# EAGLE board Proiect v25 (EAGLE 9.7.0)
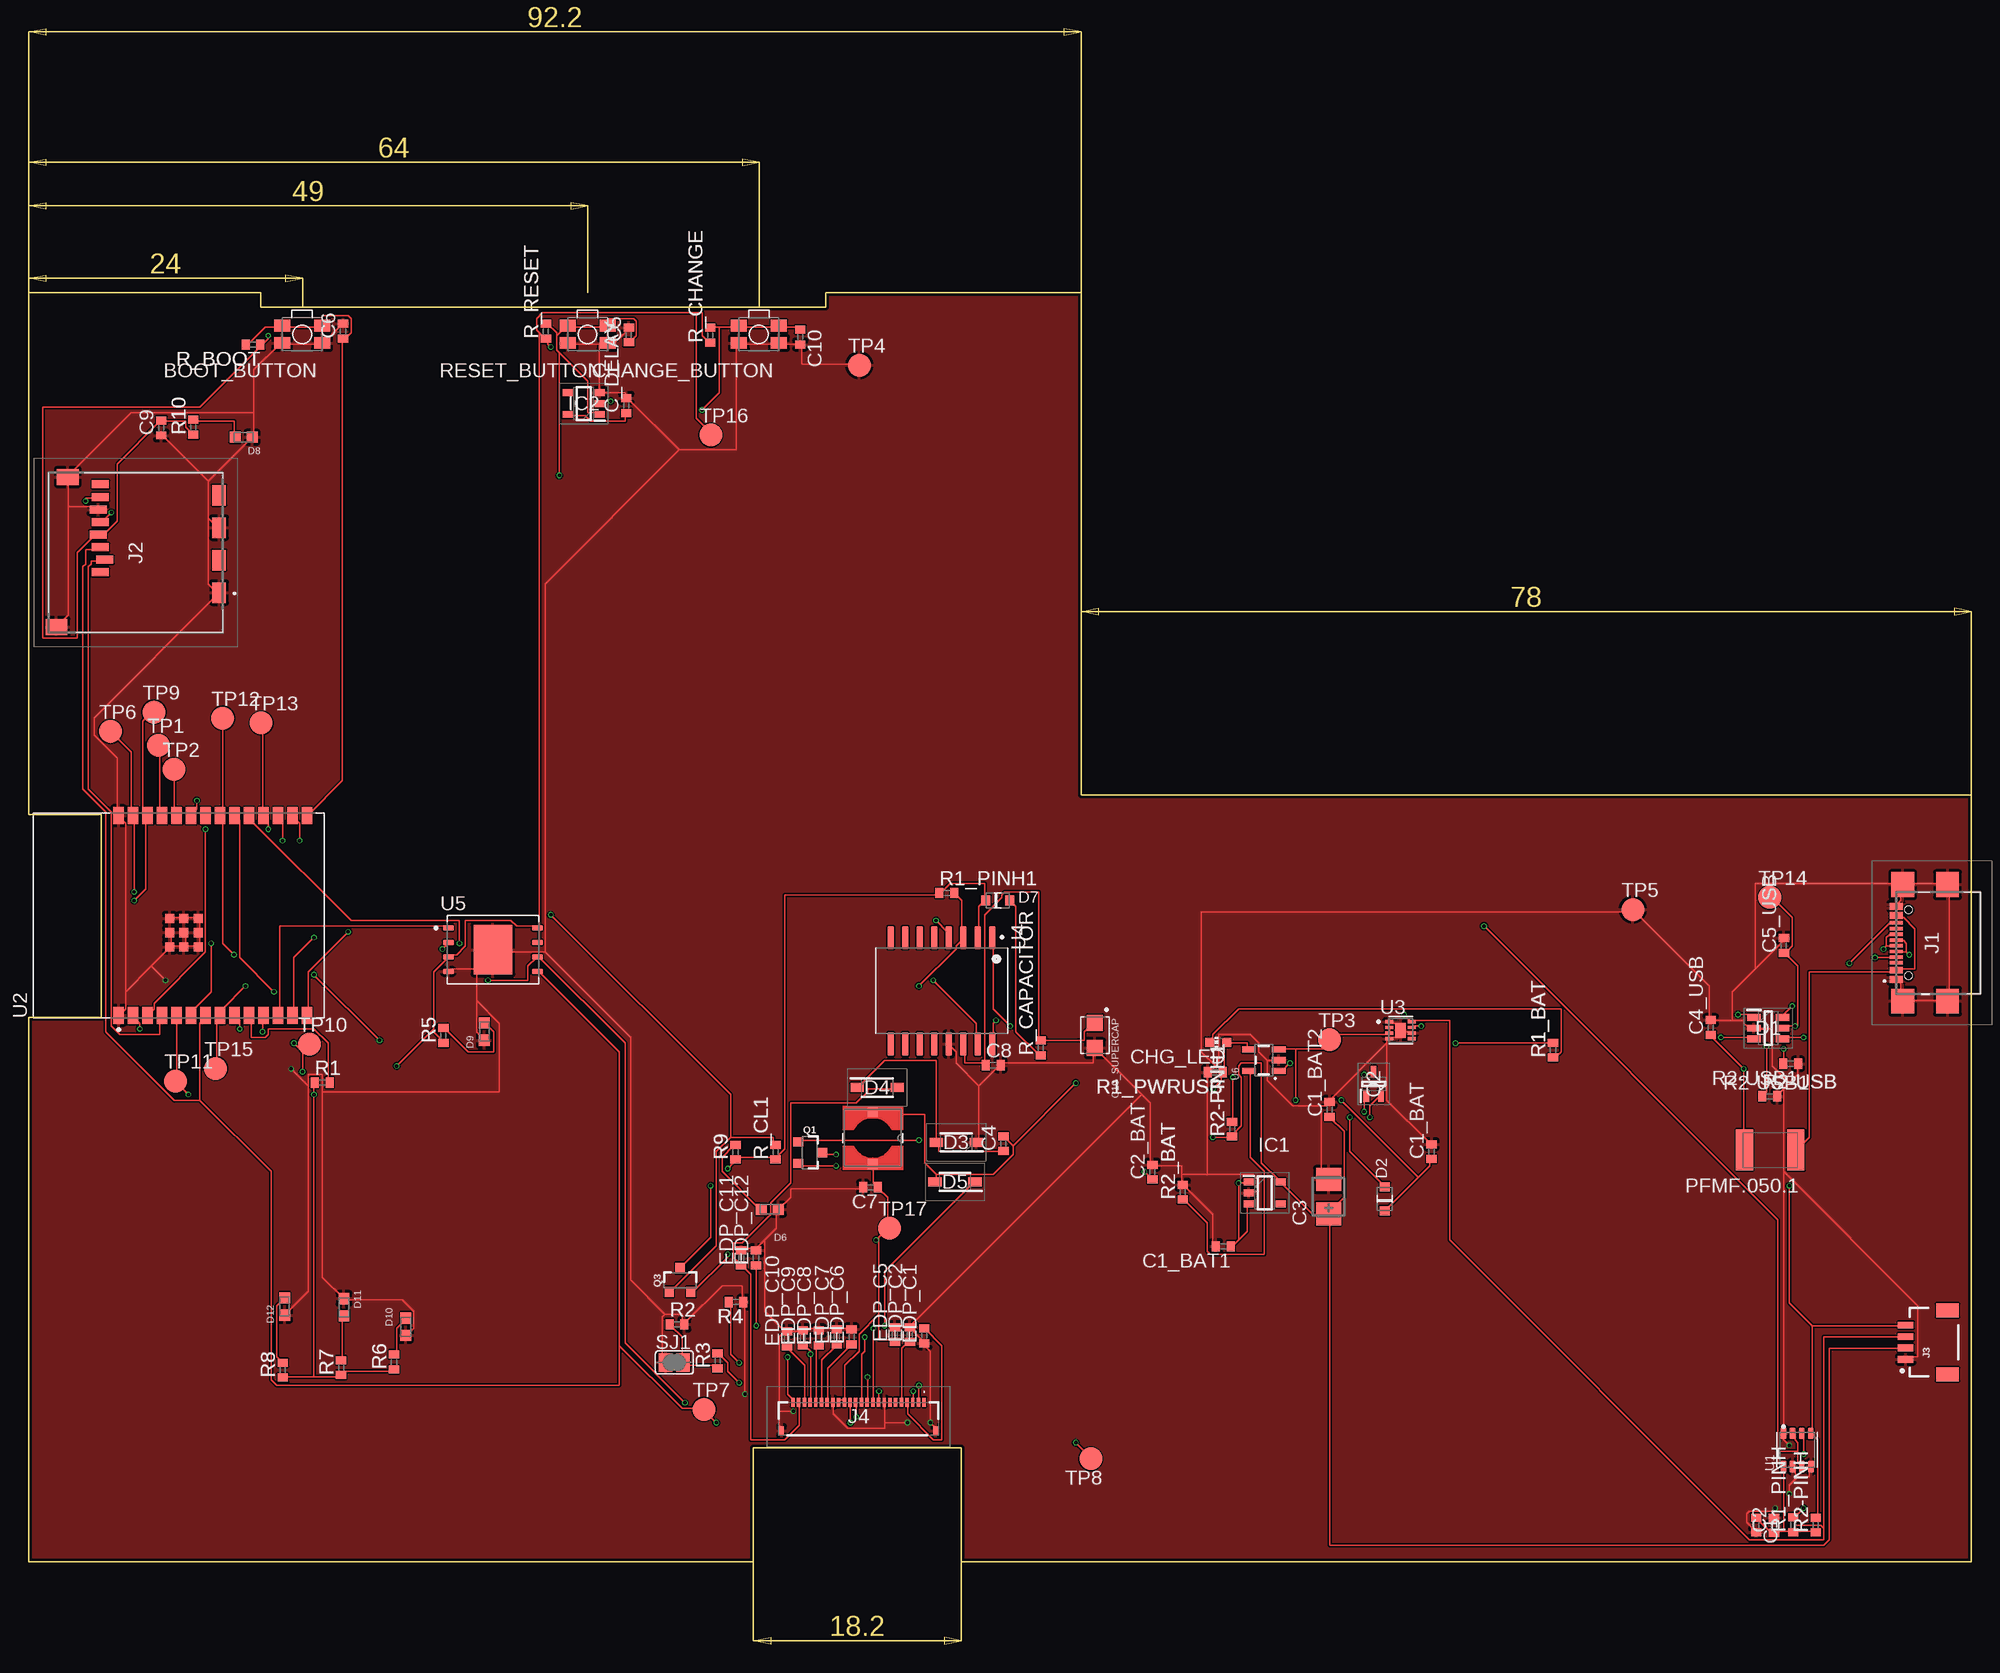
[diagram p0: board, top side]
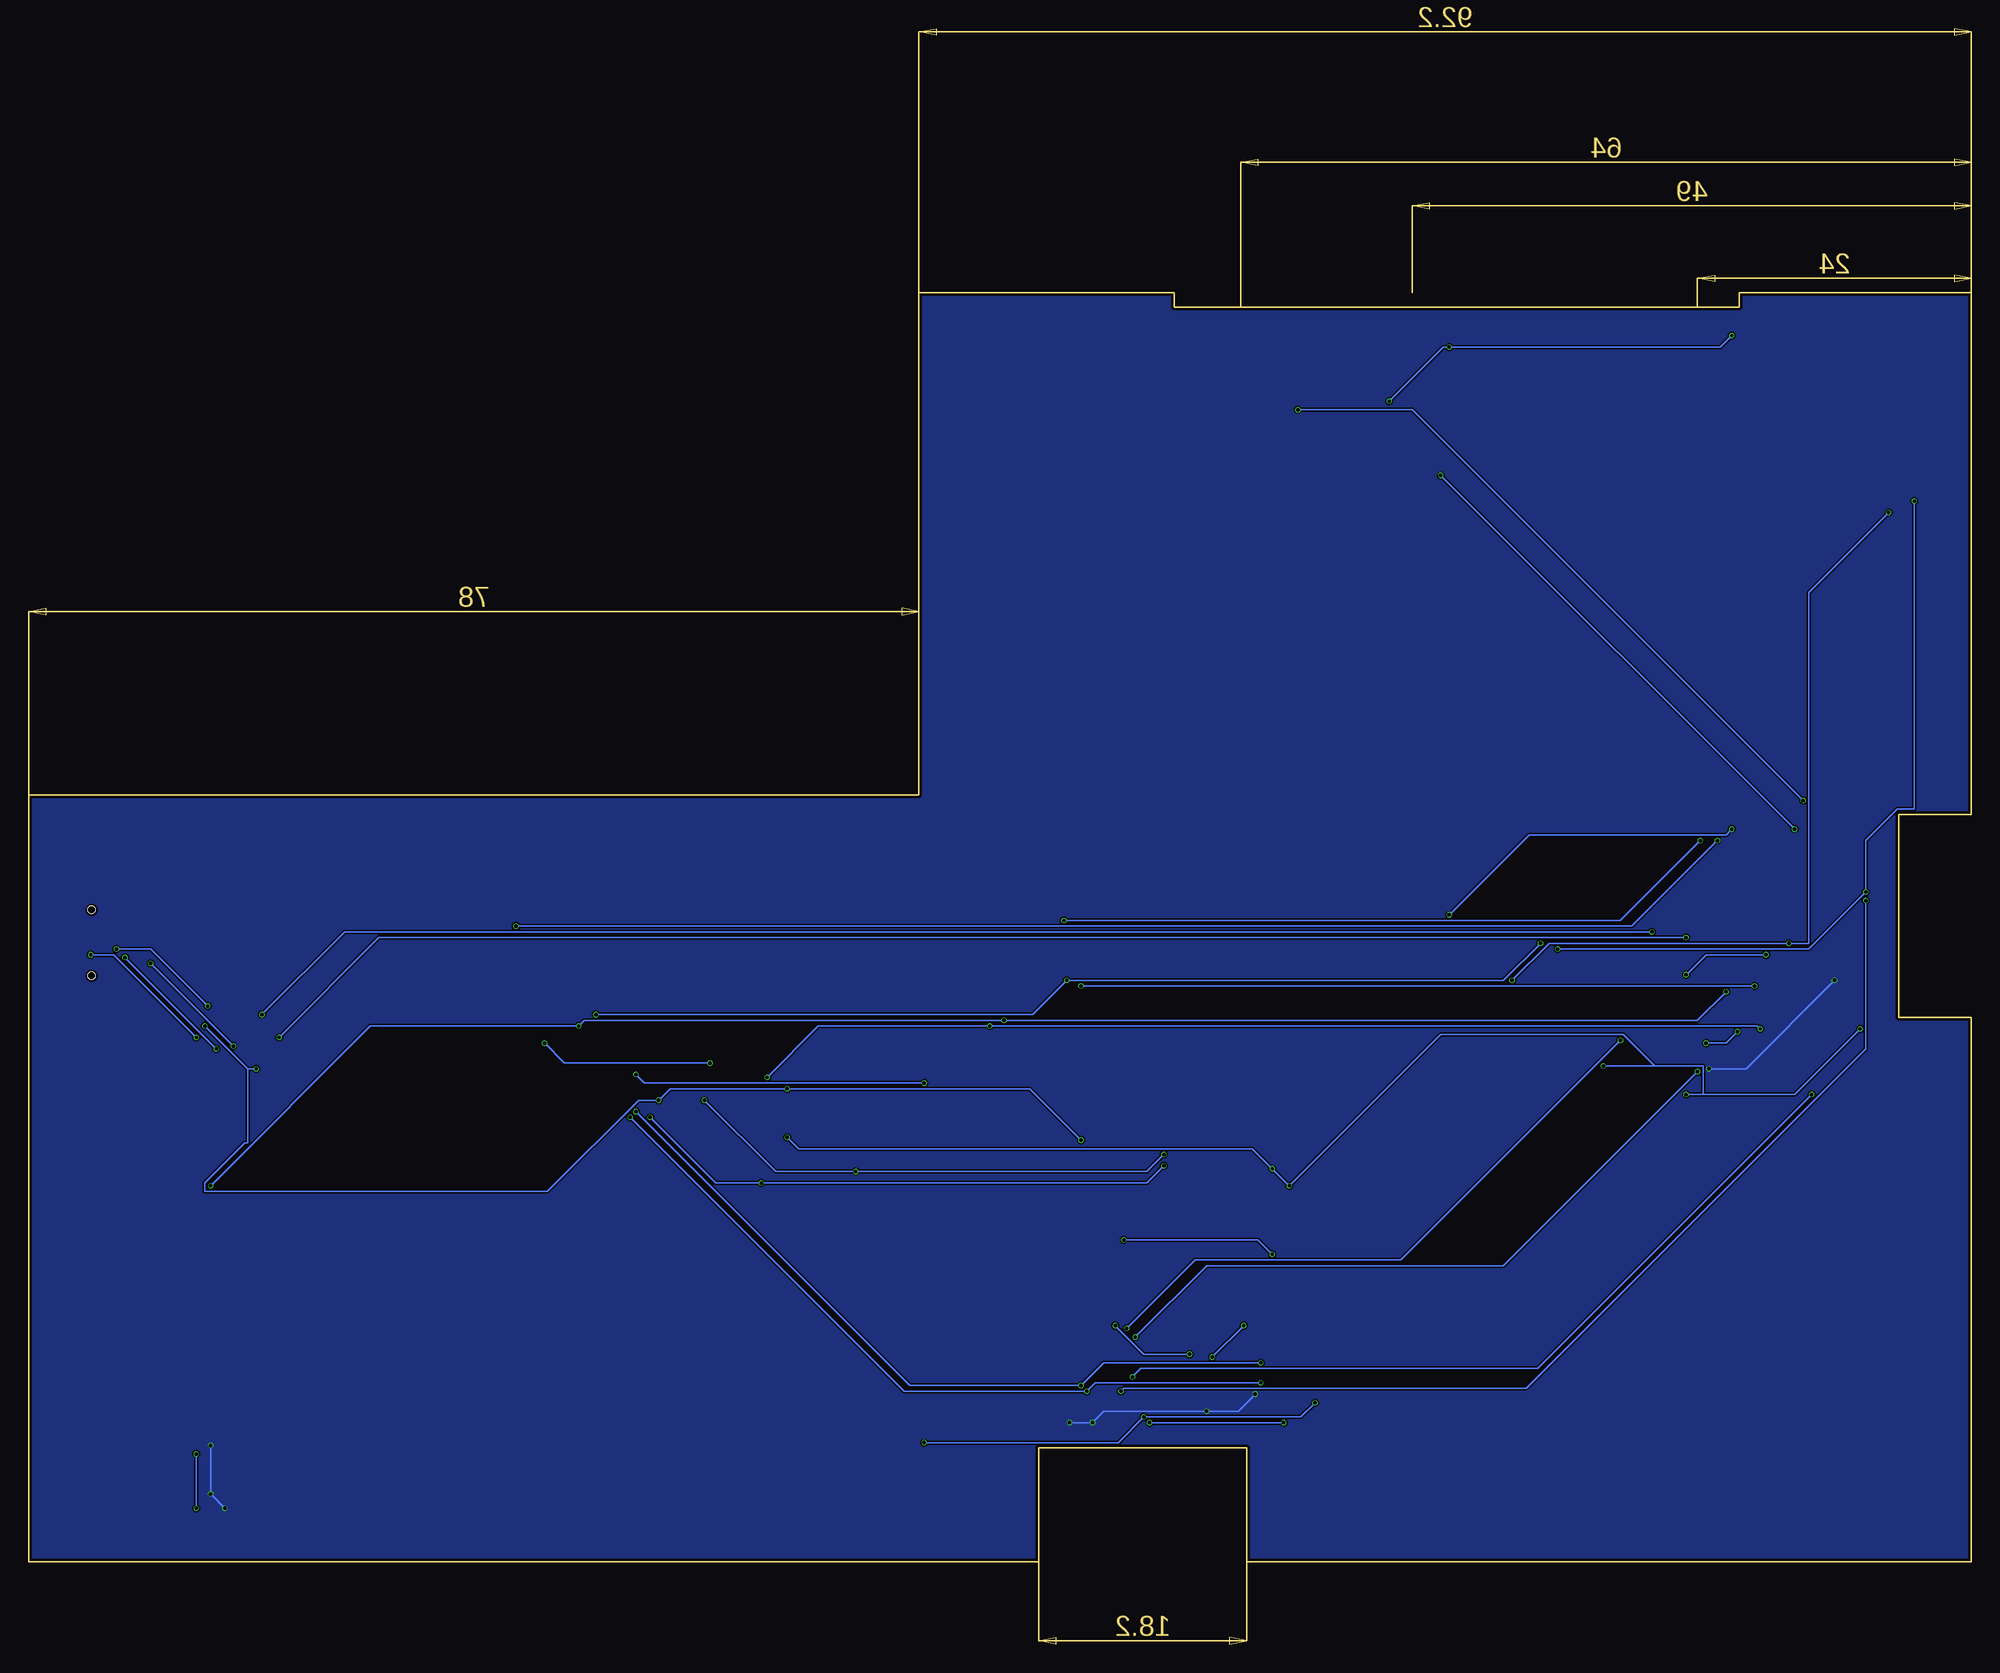
[diagram p1: board, bottom side, seen from below]

Size 170.2 x 111.2 mm. Coordinates in mm from the lower left corner, seen from the top.
Outline: 0,111.2 20.32,111.2 20.32,109.93 69.85,109.93 69.85,111.2 92.2,111.2 92.2,67.2 170.2,67.2 170.2,0 81.7,0 81.7,10 63.5,10 63.5,0 0,0 0,47.7 6.35,47.7 6.35,65.48 0,65.48 0,111.2
Copper layers (1*16): Top 0.035mm / dielectric 1.6mm / Bottom 0.035mm
Design rules "jlcpcb-2layers.dru": minimum track width 5mil, minimum drill 0.3mm, track to track 5mil, track to pad 5mil, pad to pad 5mil, via to via 5mil, smd to smd 5mil, copper to edge 0.2mm, drill to drill 6mil, minimum pad ring 10mil, minimum via ring 3mil, stop-mask expansion 4mil, vias tented up to drill 0mil, thermal gap 10mil

## Footprints (pad centres in the part's own frame; a part is rotated, then mirrored left to right if it is on the bottom)
MYBUTTON = smd 1.4 x 1.05: 1 1.75,0.75; 2 -1.75,0.75; 3 -1.75,-0.75; 4 1.75,-0.75
ESP32_WROVER_EAGLE-LTSPICE_C0402 = smd 0.7 x 0.9: 1 -0.65,0; 2 0.65,0
RCL_CT3528 = smd 2 x 2.2: + -1.5,0; - 1.5,0
CAPCP3225X100N = smd 1.4 x 1.4: 1 -1.1,0; 2 1.1,0
ADAFRUIT_CHIP-LED0603 = smd 0.8 x 0.8: A 0,-0.75; C 0,0.75
SOT95P280X145-6N = smd 1.2 x 0.6: 1 -1.25,0.95; 2 -1.25,0; 3 -1.25,-0.95; 4 1.25,-0.95; 5 1.25,0; 6 1.25,0.95
ESP32_WROVER_AVX---SD0805S020S1R0_AVX_SD0805S020S1R0_0 = smd 0.8 x 0.9: 1 -1.05,0; 2 1.05,0
SOD3716X135N = smd 1.15 x 0.8: 1 -1.75,0; 2 1.75,0
DIOC1608X36N = smd 0.97 x 0.94: 1 -0.75,0; 2 0.75,0
SOT95P280X120-5N = smd 0.9 x 0.6: 1 -1.4,0.95; 2 -1.4,0; 3 -1.4,-0.95; 4 1.4,-0.95; 5 1.4,0.95
SOT95P280X125-5N = smd 0.9 x 0.6: 1 -1.4,0.95; 2 -1.4,0; 3 -1.4,-0.95; 4 1.4,-0.95; 5 1.4,0.95
SAMACSYS_PARTS_USB4110GFA = smd 0.3 x 1.15: A1 -3.35,3.678; A4 -2.55,3.678; A5 -1.25,3.678; A6 -0.25,3.678; A7 0.25,3.678; A8 1.25,3.678; A9 2.55,3.678; A12 3.35,3.678; B1 3.05,3.678; B4 2.25,3.678; B5 1.75,3.678; B6 0.75,3.678; B7 -0.75,3.678; B8 -1.75,3.678; B9 -2.25,3.678; B12 -3.05,3.678 | smd 2.18 x 2: MP1 -5.11,-0.827; MP2 5.11,-0.827; MP3 -5.11,3.103; MP4 5.11,3.103 | hole 0.65: -2.89,2.603; 2.89,2.603
112ATAARR03ATTEND = smd 1.8 x 1.2: G1 10.6,10.4; G2 4.9,10.4; S1 7.75,10.4; S2 2.05,10.4 | smd 1.4 x 1.9: G3 13.6,-3.85; G4 0.45,-2.85 | smd 0.7 x 1.5: P1 8.8,0; P2 7.7,0.4; P3 6.6,0; P4 5.5,-0.2; P5 4.4,0; P6 3.3,-0.2; P7 2.2,0; P8 1.1,0
JST04_1MM_RA = smd 0.6 x 1.35: 1 -1.5,0; 2 -0.5,0; 3 0.5,0; 4 1.5,0 | smd 1.2 x 2: NC1 2.8,-3.675; NC2 -2.8,-3.675
FH34SRJ24S05SH99 = smd 0.3 x 0.8: 1 5.75,1.45; 2 5.25,1.45; 3 4.75,1.45; 4 4.25,1.45; 5 3.75,1.45; 6 3.25,1.45; 7 2.75,1.45; 8 2.25,1.45; 9 1.75,1.45; 10 1.25,1.45; 11 0.75,1.45; 12 0.25,1.45; 13 -0.25,1.45; 14 -0.75,1.45; 15 -1.25,1.45; 16 -1.75,1.45; 17 -2.25,1.45; 18 -2.75,1.45; 19 -3.25,1.45; 20 -3.75,1.45; 21 -4.25,1.45; 22 -4.75,1.45; 23 -5.25,1.45; 24 -5.75,1.45 | smd 0.4 x 0.8: MP1 6.75,-1.05; MP2 -6.75,-1.05
IND_4828-WE-TPC_WRE = smd 0.889 x 0.889: 1 -2.286,0; 2 2.286,0
ESP32C6_VARISTOR_CT/CN1812 = smd 1.5 x 3.6: 1 -2.25,0; 2 2.25,0
ESP32_WROVER_SPARKFUN-DISCRETESEMI_SOT23-3 = smd 0.8 x 0.9: 1 -0.95,-1; 2 0.95,-1; 3 0,1.1
SOT65P210X110-3N = smd 1.05 x 0.5: 1 -1.05,0.65; 2 -1.05,-0.65; 3 1.05,0
ESP32_WROVER_EAGLE-LTSPICE_R0402 = smd 0.7 x 0.9: 1 -0.65,0; 2 0.65,0
SJ = smd 1.168 x 1.6: 1 -0.762,0; 2 0.762,0
TP20R = smd 2 x 2: TP 0,0
ESP32_WROVER_BME680_PSON80P300X300X100-8N = smd 1.016 x 0.5: 1 1.458,1.2; 2 1.458,0.4; 3 1.458,-0.4; 4 1.458,-1.2; 5 -1.458,-1.22; 6 -1.458,-0.4; 7 -1.458,0.4; 8 -1.458,1.2
XCVR_ESP32-C6-WROOM-1-N8 = smd 1.5 x 0.9: 1 -8.75,5.26; 2 -8.75,3.99; 3 -8.75,2.72; 4 -8.75,1.45; 5 -8.75,0.18; 6 -8.75,-1.09; 7 -8.75,-2.36; 8 -8.75,-3.63; 9 -8.75,-4.9; 10 -8.75,-6.17; 11 -8.75,-7.44; 12 -8.75,-8.71; 13 -8.75,-9.98; 14 -8.75,-11.25; 15 8.75,-11.25; 16 8.75,-9.98; 17 8.75,-8.71; 18 8.75,-7.44; 19 8.75,-6.17; 20 8.75,-4.9; 21 8.75,-3.63; 22 8.75,-2.36; 23 8.75,-1.09; 24 8.75,0.18; 25 8.75,1.45; 26 8.75,2.72; 27 8.75,3.99; 28 8.75,5.26 | smd 0.8 x 0.8: 29_1 -2.755,0.79; 29_2 -1.505,0.79; 29_3 -0.255,0.79; 29_4 -2.755,-0.46; 29_5 -1.505,-0.46; 29_6 -0.255,-0.46; 29_7 -2.755,-1.71; 29_8 -1.505,-1.71; 29_9 -0.255,-1.71
SON50P200X200X80-9N = smd 0.76 x 0.27: 1 -0.985,0.75; 2 -0.985,0.25; 3 -0.985,-0.25; 4 -0.985,-0.75; 5 0.985,-0.75; 6 0.985,-0.25; 7 0.985,0.25; 8 0.985,0.75 | smd 0.9 x 1.3: 9 0,0
SOIC127P1032X265-16N = smd 2.05 x 0.59: 1 -4.655,4.445; 2 -4.655,3.175; 3 -4.655,1.905; 4 -4.655,0.635; 5 -4.655,-0.635; 6 -4.655,-1.905; 7 -4.655,-3.175; 8 -4.655,-4.445; 9 4.655,-4.445; 10 4.655,-3.175; 11 4.655,-1.905; 12 4.655,-0.635; 13 4.655,0.635; 14 4.655,1.905; 15 4.655,3.175; 16 4.655,4.445
SON127P600X800X80-9N = smd 0.94 x 0.44: 1 -3.895,1.905; 2 -3.895,0.635; 3 -3.895,-0.635; 4 -3.895,-1.905; 5 3.895,-1.905; 6 3.895,-0.635; 7 3.895,0.635; 8 3.895,1.905 | smd 3.4 x 4.3: 9 0,0
ESP32_WROVER_SPARKFUN-IC-POWER_SOT23-5 = smd 0.55 x 1.2: 1 -0.95,-1.3; 2 0,-1.3; 3 0.95,-1.3; 4 0.95,1.3; 5 -0.95,1.3

## Placement (x,y rotation side)
BOOT_BUTTON  BUTTON_CUSYOMV11  [MYBUTTON]  23.97,107.56 180 top
C1  4.7uF  [ESP32_WROVER_EAGLE-LTSPICE_C0402]  151.34,3.23 270 top
C1_BAT  4.7uF  [ESP32_WROVER_EAGLE-LTSPICE_C0402]  122.9,35.94 90 top
C1_BAT1  4.7uF  [ESP32_WROVER_EAGLE-LTSPICE_C0402]  104.67,27.65 180 top
C1_BAT2  4.7uF  [ESP32_WROVER_EAGLE-LTSPICE_C0402]  113.97,39.64 90 top
C2  100nF  [ESP32_WROVER_EAGLE-LTSPICE_C0402]  152.9,3.2 90 top
C2_BAT  4.7uF  [ESP32_WROVER_EAGLE-LTSPICE_C0402]  98.45,34.15 90 top
C3  100uF TANT  [RCL_CT3528]  113.89,32 90 top
C4  4.7uF/25V  [ESP32_WROVER_EAGLE-LTSPICE_C0402]  85.4,36.64 90 top
C4_USB  100nF  [ESP32_WROVER_EAGLE-LTSPICE_C0402]  147.36,46.82 90 top
C5  1uF  [ESP32_WROVER_EAGLE-LTSPICE_C0402]  52.59,107.52 90 top
C5_USB  4.7uF  [ESP32_WROVER_EAGLE-LTSPICE_C0402]  153.77,54 90 top
C6  100nF  [ESP32_WROVER_EAGLE-LTSPICE_C0402]  27.55,107.84 90 top
C7  10uF  [ESP32_WROVER_EAGLE-LTSPICE_C0402]  73.76,32.83 180 top
C8  100nF  [ESP32_WROVER_EAGLE-LTSPICE_C0402]  84.5,43.52 0 top
C9  100nF  [ESP32_WROVER_EAGLE-LTSPICE_C0402]  11.62,99.36 90 top
C10  100nF  [ESP32_WROVER_EAGLE-LTSPICE_C0402]  67.61,107.33 270 top
C10_SUPERCAP  CPH3225A  [CAPCP3225X100N]  93.42,46.13 270 top
C_DELAY  100nF  [ESP32_WROVER_EAGLE-LTSPICE_C0402]  52.36,101.33 90 top
CHANGE_BUTTON  BUTTON_CUSYOMV11  [MYBUTTON]  63.97,107.56 180 top
CHG_LED  [ADAFRUIT_CHIP-LED0603]  104.22,45.53 90 top
D1  USBLC6-2SC6Y  [SOT95P280X145-6N]  152.4,46.76 0 top
D2  ESP32_WROVER_AVX---SD0805S020S1R0_AVX_SD0805S020S1R0_0_0  [ESP32_WROVER_AVX---SD0805S020S1R0_AVX_SD0805S020S1R0_0]  118.8,31.8 90 top
D3  MBR0530  [SOD3716X135N]  81.26,36.76 180 top
D4  MBR0530  [SOD3716X135N]  74.34,41.56 0 top
D5  MBR0530  [SOD3716X135N]  81.16,33.3 180 top
D6  PGB1010603MR1  [DIOC1608X36N]  64.94,30.89 180 top
D7  ESP32_WROVER_AVX---SD0805S020S1R0_AVX_SD0805S020S1R0_0_0  [ESP32_WROVER_AVX---SD0805S020S1R0_AVX_SD0805S020S1R0_0]  84.9,57.96 0 top
D8  PGB1010603MR1  [DIOC1608X36N]  18.84,98.55 180 top
D9  PGB1010603MR1  [DIOC1608X36N]  39.93,46.46 90 top
D10  PGB1010603MR1  [DIOC1608X36N]  33.04,20.61 90 top
D11  PGB1010603MR1  [DIOC1608X36N]  27.63,22.32 270 top
D12  PGB1010603MR1  [DIOC1608X36N]  22.44,22.37 90 top
EDP_C1  1uF/50V  [ESP32_WROVER_EAGLE-LTSPICE_C0402]  78.47,19.81 90 top
EDP_C2  1uF/50V  [ESP32_WROVER_EAGLE-LTSPICE_C0402]  77.21,19.91 90 top
EDP_C5  0.1uF/50V  [ESP32_WROVER_EAGLE-LTSPICE_C0402]  75.89,19.92 90 top
EDP_C6  0.1uF/50V  [ESP32_WROVER_EAGLE-LTSPICE_C0402]  72.1,19.72 90 top
EDP_C7  0.1uF/50V  [ESP32_WROVER_EAGLE-LTSPICE_C0402]  70.79,19.73 90 top
EDP_C8  0.1uF/50V  [ESP32_WROVER_EAGLE-LTSPICE_C0402]  69.22,19.63 90 top
EDP_C9  0.1uF/50V  [ESP32_WROVER_EAGLE-LTSPICE_C0402]  67.83,19.63 90 top
EDP_C10  0.1uF/50V  [ESP32_WROVER_EAGLE-LTSPICE_C0402]  66.43,19.55 90 top
EDP_C11  0.1uF/50V  [ESP32_WROVER_EAGLE-LTSPICE_C0402]  62.42,26.64 90 top
EDP_C12  0.1uF/50V  [ESP32_WROVER_EAGLE-LTSPICE_C0402]  63.73,26.64 90 top
IC1  XC6220A331MR-G  [SOT95P280X120-5N]  108.29,32.33 0 top
IC2  BD5229G-TR  [SOT95P280X125-5N]  48.64,101.5 180 top
J1  SAMACSYS_PARTS_USB4110-GF-A  [SAMACSYS_PARTS_USB4110GFA]  167.28,54.24 90 top
J2  112A-TAAR-R03_ATTEND  [112ATAARR03ATTEND]  6.29,95.52 270 top
J3  QWIIC_RIGHT_ANGLE  [JST04_1MM_RA]  164.43,19.24 90 top
J4  FH34SRJ-24S-0.5SH_99_  [FH34SRJ24S05SH99]  72.71,12.54 0 top
L1  744043680IND_4828-WE-TPC_WRE  [IND_4828-WE-TPC_WRE]  73.96,37.14 270 top
PFMF.050.1  ESP32C6_VARISTORCN1812  [ESP32C6_VARISTOR_CT/CN1812]  152.57,36.09 180 top
Q1  20V/4.2A/52mΩ/1.4W  [ESP32_WROVER_SPARKFUN-DISCRETESEMI_SOT23-3]  68.43,35.86 270 top
Q2  SI1308EDL-T1-GE3  [SOT65P210X110-3N]  117.83,41.88 90 top
Q3  20V/4.2A/52mΩ/1.4W  [ESP32_WROVER_SPARKFUN-DISCRETESEMI_SOT23-3]  57.07,24.65 0 top
R1  10K  [ESP32_WROVER_EAGLE-LTSPICE_R0402]  25.72,42 0 top
R1_BAT  200  [ESP32_WROVER_EAGLE-LTSPICE_R0402]  133.54,44.84 90 top
R1_PINH  10K  [ESP32_WROVER_EAGLE-LTSPICE_R0402]  154.59,3.25 90 top
R1_PINH1  10K  [ESP32_WROVER_EAGLE-LTSPICE_R0402]  80.44,58.61 0 top
R1_PWRUSB  100K  [ESP32_WROVER_EAGLE-LTSPICE_R0402]  103.97,42.9 180 top
R2  2.2  [ESP32_WROVER_EAGLE-LTSPICE_R0402]  56.81,20.82 0 top
R2-PINH  10K  [ESP32_WROVER_EAGLE-LTSPICE_R0402]  156.55,3.22 90 top
R2-PINH1  10K  [ESP32_WROVER_EAGLE-LTSPICE_R0402]  105.43,37.92 90 top
R2-USB  5k1  [ESP32_WROVER_EAGLE-LTSPICE_R0402]  152.54,40.8 0 top
R2-USB1  5k1  [ESP32_WROVER_EAGLE-LTSPICE_R0402]  154.36,43.65 180 top
R2_BAT  2K  [ESP32_WROVER_EAGLE-LTSPICE_R0402]  101.11,32.4 90 top
R3  0.47  [ESP32_WROVER_EAGLE-LTSPICE_R0402]  60.36,17.62 90 top
R4  10K  [ESP32_WROVER_EAGLE-LTSPICE_R0402]  61.98,22.77 180 top
R5  10K  [ESP32_WROVER_EAGLE-LTSPICE_R0402]  36.34,46.12 90 top
R6  10K  [ESP32_WROVER_EAGLE-LTSPICE_R0402]  32.01,17.52 90 top
R7  10K  [ESP32_WROVER_EAGLE-LTSPICE_R0402]  27.38,17.02 90 top
R8  10K  [ESP32_WROVER_EAGLE-LTSPICE_R0402]  22.26,16.8 90 top
R9  10K  [ESP32_WROVER_EAGLE-LTSPICE_R0402]  61.93,35.9 90 top
R10  10K  [ESP32_WROVER_EAGLE-LTSPICE_R0402]  14.43,99.42 90 top
R_BOOT  10K  [ESP32_WROVER_EAGLE-LTSPICE_R0402]  19.66,106.66 180 top
R_CAPACITOR  15K  [ESP32_WROVER_EAGLE-LTSPICE_R0402]  88.67,45.03 90 top
R_CHANGE  10K  [ESP32_WROVER_EAGLE-LTSPICE_R0402]  59.71,107.48 90 top
R_CL1  10K  [ESP32_WROVER_EAGLE-LTSPICE_R0402]  65.44,35.9 90 top
R_RESET  10K  [ESP32_WROVER_EAGLE-LTSPICE_R0402]  45.32,107.84 90 top
RESET_BUTTON  BUTTON_CUSYOMV11  [MYBUTTON]  48.97,107.56 180 top
SJ1  [SJ]  56.57,17.47 0 top
TP1  TP  [TP20R]  11.38,71.55 0 top
TP2  TP  [TP20R]  12.73,69.45 0 top
TP3  TP  [TP20R]  113.98,45.75 0 top
TP4  TP  [TP20R]  72.78,104.86 0 top
TP5  TP  [TP20R]  140.53,57.16 0 top
TP6  TP  [TP20R]  7.18,72.76 0 top
TP7  TP  [TP20R]  59.17,13.36 0 top
TP8  TP  [TP20R]  93.07,9.04 180 top
TP9  TP  [TP20R]  10.99,74.46 0 top
TP10  TP  [TP20R]  24.61,45.36 0 top
TP11  TP  [TP20R]  12.88,42.14 0 top
TP12  TP  [TP20R]  17.01,73.92 0 top
TP13  TP  [TP20R]  20.37,73.52 0 top
TP14  TP  [TP20R]  152.53,58.22 0 top
TP15  TP  [TP20R]  16.39,43.22 0 top
TP16  TP  [TP20R]  59.78,98.74 0 top
TP17  TP  [TP20R]  75.43,29.24 0 top
U1  ESP32_WROVER_BME680_BME680  [ESP32_WROVER_BME680_PSON80P300X300X100-8N]  154.93,9.81 90 top
U2  ESP32-C6-WROOM-1-N8  [XCVR_ESP32-C6-WROOM-1-N8]  13.15,56.64 90 top
U3  MAX17048G+T10  [SON50P200X200X80-9N]  120.19,46.58 0 top
U4  DS3231SN#  [SOIC127P1032X265-16N]  79.99,50.04 270 top
U5  W25Q512JVEIQ  [SON127P600X800X80-9N]  40.68,53.64 0 top
U6  ESP32_WROVER_SPARKFUN-IC-POWER_MCP73831  [ESP32_WROVER_SPARKFUN-IC-POWER_SOT23-5]  108.21,43.96 90 top

## Library data of the parts
BOOT_BUTTON C1 C1_BAT1 C1_BAT2 C2 C4_USB C5 C5_USB C6 C8-C10 C_DELAY CHANGE_BUTTON CHG_LED D2 D6-D12 EDP_C1 EDP_C2 EDP_C5-EDP_C12 PFMF.050.1 R1 R1_BAT R1_PINH R1_PINH1 R1_PWRUSB R2 R2-PINH R2-PINH1 R2-USB R2-USB1 R2_BAT R3-R10 R_BOOT R_CAPACITOR R_CHANGE R_CL1 R_RESET RESET_BUTTON SJ1 TP1-TP17 = DeskAssistant v19 v1
C1_BAT C2_BAT C4 C7 = DeskAssistant v19 v1; SPICEMODEL: NONE; SPICEPREFIX: C
C3 = DeskAssistant v19 v1; SPICEPREFIX: C
C10_SUPERCAP = DeskAssistant v19 v1; AVAILABILITY: Not in stock; CHECK_PRICES: https://www.snapeda.com/parts/CPH3225A/Seiko+Instruments/view-part/?ref=eda; DESCRIPTION: 11 mF (EDLC) Supercapacitor 3.3 V 1210 (3225 Metric) - -; MF: Seiko Instruments; MP: CPH3225A; PACKAGE: 1210 Seiko; PRICE: None; PURCHASE-URL: https://www.snapeda.com/api/url_track_click_mouser/?unipart_id=562593&manufacturer=Seiko Instruments&part_name=CPH3225A&search_term=None; SNAPEDA_LINK: https://www.snapeda.com/parts/CPH3225A/Seiko+Instruments/view-part/?ref=snap
D1 = DeskAssistant v19 v1; AVAILABILITY: In Stock; CHECK_PRICES: https://www.snapeda.com/parts/USBLC6-2SC6Y/STMicroelectronics/view-part/?ref=eda; DESCRIPTION: 17V Clamp 5A (8/20µs) Ipp Tvs Diode Surface Mount SOT-23-6; MF: STMicroelectronics; MP: USBLC6-2SC6Y; PACKAGE: SOT-23-6 STMicroelectronics; PRICE: None; SNAPEDA_LINK: https://www.snapeda.com/parts/USBLC6-2SC6Y/STMicroelectronics/view-part/?ref=snap
D3-D5 = DeskAssistant v19 v1; AVAILABILITY: In Stock; CHECK_PRICES: https://www.snapeda.com/parts/MBR0530/Onsemi/view-part/?ref=eda; DESCRIPTION: Diode Schottky 30 V 500mA Surface Mount SOD-123; MF: ON Semiconductor; MP: MBR0530; PACKAGE: SOD-123-2 ON Semiconductor; PRICE: None; PURCHASE-URL: https://www.snapeda.com/api/url_track_click_mouser/?unipart_id=179458&manufacturer=ON Semiconductor&part_name=MBR0530&search_term=None; SNAPEDA_LINK: https://www.snapeda.com/parts/MBR0530/Onsemi/view-part/?ref=snap
IC1 = DeskAssistant v19 v1; DESCRIPTION: LDO Voltage Regulators; HEIGHT: 1.2mm; MANUFACTURER_NAME: Torex; MANUFACTURER_PART_NUMBER: XC6220A331MR-G; MOUSER_PART_NUMBER: 865-XC6220A331MR-G; MOUSER_PRICE-STOCK: https://www.mouser.co.uk/ProductDetail/Torex-Semiconductor/XC6220A331MR-G?qs=AsjdqWjXhJ8ZSWznL1J0gg%3D%3D
IC2 = DeskAssistant v19 v1; DESCRIPTION: Voltage Detector with Adjustable Delay Time: CMOS processes are utilized to develop high precision, low current consumption CMOS reset ICs that allow arbitrary setting of the delay time. The extensive lineup includes both Nch Open Drain and CMOS output types in a wide range of detection voltages (from 2.3V to 6.0V, in 0.1V steps), enabling selection of the ideal solution based on customer requirements. In addition, the entire series is of course both lead-free and RoHS-compliant.; HEIGHT: 1.25mm; MANUFACTURER_NAME: ROHM Semiconductor; MANUFACTURER_PART_NUMBER: BD5229G-TR; MOUSER_PART_NUMBER: 755-BD5229G-TR; MOUSER_PRICE-STOCK: https://www.mouser.co.uk/ProductDetail/ROHM-Semiconductor/BD5229G-TR?qs=4kLU8WoGk0vvnhrrYwdszw%3D%3D
J1 = DeskAssistant v19 v1; DESCRIPTION: CONN USB 2.0 TYPE-C R/A SMT; HEIGHT: 3.26mm; MANUFACTURER_NAME: GCT (GLOBAL CONNECTOR TECHNOLOGY); MANUFACTURER_PART_NUMBER: USB4110-GF-A; MOUSER_PART_NUMBER: 640-USB4110-GF-A; MOUSER_PRICE-STOCK: https://www.mouser.co.uk/ProductDetail/GCT/USB4110-GF-A?qs=KUoIvG%2F9IlYiZvIXQjyJeA%3D%3D
J2 = DeskAssistant v19 v1; DESCRIPTION: Micro SD Card Socket, Push-Push Type, Top Mount, SMT, H=1.83mm, 10u; HEIGHT: 1.9mm; MANUFACTURER_NAME: ATTEND; MANUFACTURER_PART_NUMBER: 112A-TAAR-R03 ATTEND
J3 = DeskAssistant v19 v1; PROD_ID: CONN-13694
J4 = DeskAssistant v19 v1; DESCRIPTION: 24 Position FFC, FPC Connector Contacts, Top and Bottom 0.020" (0.50mm) Surface Mount, Right Angle; HEIGHT: 1.1mm; MANUFACTURER_NAME: Hirose; MANUFACTURER_PART_NUMBER: FH34SRJ-24S-0.5SH(99); MOUSER_PART_NUMBER: 798-FH34SRJ24S05SH99; MOUSER_PRICE-STOCK: https://www.mouser.co.uk/ProductDetail/Hirose-Connector/FH34SRJ-24S-0.5SH99?qs=vcbW%252B4%252BSTIpKBl5ap9J8Fw%3D%3D
L1 = DeskAssistant v19 v1; COPYRIGHT: Copyright (C) 2024 Ultra Librarian. All rights reserved.; MANUFACTURER_PART_NUMBER: 744043680; MFR_NAME: Wurth Electronics
Q1 Q3 = DeskAssistant v19 v1; PROD_ID: TRAN-14388
Q2 = DeskAssistant v19 v1; AVAILABILITY: In Stock; CHECK_PRICES: https://www.snapeda.com/parts/SI1308EDL-T1-GE3/Vishay+Siliconix/view-part/?ref=eda; DESCRIPTION: Si1308EDL-T1-GE3 N-channel MOSFET Transistor, 1.5 A, 30 V, 3-Pin SC-70 | Siliconix / Vishay SI1308EDL-T1-GE3; MF: Vishay Siliconix; MP: SI1308EDL-T1-GE3; PACKAGE: SOT-323 Vishay Semiconductor; PRICE: None; PURCHASE-URL: https://www.snapeda.com/api/url_track_click_mouser/?unipart_id=274603&manufacturer=Vishay Siliconix&part_name=SI1308EDL-T1-GE3&search_term=None; SNAPEDA_LINK: https://www.snapeda.com/parts/SI1308EDL-T1-GE3/Vishay+Siliconix/view-part/?ref=snap
U1 = DeskAssistant v19 v1; AVAILABILITY: Unavailable; DESCRIPTION: Integrated Environmental Unit; MF: Bosch Sensortec; MP: BME680; PACKAGE: LGA-8 Bosch Tools; PRICE: None
U2 = DeskAssistant v19 v1; AVAILABILITY: In Stock; CHECK_PRICES: https://www.snapeda.com/parts/ESP32-C6-WROOM-1-N8/Espressif+Systems/view-part/?ref=eda; DESCRIPTION: Multiprotocol Modules ESP32-C6 module, Wi-Fi 6 in 2.4 GHz band, Bluetooth 5, Zigbee 3.0 and Thread. ESP34-WROOM Compatible - ENGINEERING SAMPLE; MF: Espressif Systems; MP: ESP32-C6-WROOM-1-N8; PACKAGE: None; PRICE: None; SNAPEDA_LINK: https://www.snapeda.com/parts/ESP32-C6-WROOM-1-N8/Espressif+Systems/view-part/?ref=snap
U3 = DeskAssistant v19 v1; AVAILABILITY: In Stock; CHECK_PRICES: https://www.snapeda.com/parts/MAX17048G+T10/Analog+Devices/view-part/?ref=eda; DESCRIPTION: 3µA 1-Cell/2-Cell Fuel Gauge with ModelGauge; MF: Analog Devices; MP: MAX17048G+T10; PACKAGE: TDFN-8 Maxim; PRICE: None; PURCHASE-URL: https://www.snapeda.com/api/url_track_click_mouser/?unipart_id=329239&manufacturer=Analog Devices&part_name=MAX17048G+T10&search_term=None; SNAPEDA_LINK: https://www.snapeda.com/parts/MAX17048G+T10/Analog+Devices/view-part/?ref=snap
U4 = DeskAssistant v19 v1; AVAILABILITY: In Stock; CHECK_PRICES: https://www.snapeda.com/parts/DS3231SN%23/Analog+Devices/view-part/?ref=eda; DESCRIPTION: Extremely Accurate I²C-Integrated RTC/TCXO/Crystal; MF: Analog Devices; MP: DS3231SN#; PACKAGE: SOIC-16 Maxim; PRICE: None; PURCHASE-URL: https://www.snapeda.com/api/url_track_click_mouser/?unipart_id=99048&manufacturer=Analog Devices&part_name=DS3231SN#&search_term=None; SNAPEDA_LINK: https://www.snapeda.com/parts/DS3231SN%23/Analog+Devices/view-part/?ref=snap
U5 = DeskAssistant v19 v1; AVAILABILITY: In Stock; CHECK_PRICES: https://www.snapeda.com/parts/W25Q512JVEIQ/Winbond+Electronics/view-part/?ref=eda; DESCRIPTION: FLASH - NOR Memory IC 512Mb (64M x 8) SPI - Quad I/O 133 MHz 8-WSON (8x6); MF: Winbond Electronics; MP: W25Q512JVEIQ; PACKAGE: Package; PRICE: None; SNAPEDA_LINK: https://www.snapeda.com/parts/W25Q512JVEIQ/Winbond+Electronics/view-part/?ref=snap
U6 = DeskAssistant v19 v1; PROD_ID: IC-09995

## Nets
3V3 [net]: C1_BAT2.1 C3.+ C9.2 D7.1 IC1.5 IC2.2 J2.P4 J3.2 Q3.3 R1.1 R1_PINH1.1 R2-PINH1.1 R5.1 R6.1 R7.1 R8.1 R9.1 R10.1 R_BOOT.1 R_CHANGE.1 R_CL1.1 R_RESET.1 TP16.TP U2.2 U4.2 U5.3 U5.7 U5.8
32KHZ: R2-PINH1.2 U2.9 U4.1
DN: D1.4 J1.A7 J1.B7
DP: D1.6 J1.A6 J1.B6
EPD_3V3 [net]: C7.1 EDP_C5.1 J4.15 J4.16 L1.2 Q3.2 TP17.TP
EPD_3V3_C [net]: Q3.1 R_CL1.2 TP13.TP U2.18
EPD_BUSY: J4.9 TP9.TP U2.26
EPD_CS: J4.12 TP10.TP U2.11
EPD_DC: J4.11 TP11.TP U2.5
EPD_RST: J4.10 TP12.TP U2.21
FLASH_CS: U2.12 U5.1
GDR: J4.2 Q2.1 R4.2
GND: BOOT_BUTTON.1 BOOT_BUTTON.2 C1.2 C1_BAT1.2 C1_BAT2.2 C1_BAT.2 C2.2 C2_BAT.2 C3.- C4_USB.2 C5.2 C5_USB.2 C6.2 C7.2 C8.2 C9.1 C10.2 C10_SUPERCAP.2 C_DELAY.2 CHANGE_BUTTON.1 CHANGE_BUTTON.2 D1.2 D3.1 D6.1 D8.1 D9.1 D10.1 D11.1 D12.1 EDP_C1.1 EDP_C2.2 EDP_C5.2 EDP_C6.2 EDP_C7.2 EDP_C8.2 EDP_C9.2 EDP_C10.2 EDP_C11.2 EDP_C12.2 IC1.2 IC2.3 J1.A1 J1.A12 J1.B1 J1.B12 J1.MP1 J1.MP2 J1.MP3 J1.MP4 J2.G1 J2.G2 J2.G3 J2.G4 J2.P6 J3.1 J4.8 J4.17 J4.MP1 J4.MP2 R1_PWRUSB.2 R2-USB1.1 R2-USB.2 R2.2 R2_BAT.2 R4.1 RESET_BUTTON.1 RESET_BUTTON.2 SJ1.1 TP4.TP TP5.TP U1.1 U1.5 U1.7 U2.1 U2.28 U2.29_1 U2.29_2 U2.29_3 U2.29_4 U2.29_5 U2.29_6 U2.29_7 U2.29_8 U2.29_9 U3.1 U3.4 U3.6 U3.9 U4.13 U5.4 U5.9 U6.2
GPI08: R1.2 U2.10
I2C_PW: C1.1 C2.1 R1_PINH.1 R2-PINH.1 U1.2 U1.6 U1.8 U2.17
INT_RTC: R1_PINH1.2 TP15.TP U2.8 U4.3
IO/BOOT: BOOT_BUTTON.3 BOOT_BUTTON.4 C6.1 R_BOOT.2 U2.15
IO/CHANGE: C10.1 CHANGE_BUTTON.3 CHANGE_BUTTON.4 R_CHANGE.2 U2.23
MISO: J2.P7 TP6.TP U2.27 U5.2
MOSI: J2.P3 J4.14 TP7.TP U2.7 U5.5
N$1: EDP_C6.1 J4.18
N$2: C1_BAT1.1 D2.2 IC1.1 IC1.3 Q1.2
N$3: J1.A5 R2-USB1.2
N$4: EDP_C7.1 J4.19
N$5: EDP_C1.2 J4.4
N$6: EDP_C2.1 J4.5
N$7: EDP_C8.1 J4.20
N$8: C_DELAY.1 IC2.5
N$9: EDP_C12.1 J4.24
N$10: D7.2 R_CAPACITOR.1
N$11: J1.B5 R2-USB.1
N$12: EDP_C10.1 J4.22
N$13: D12.2 R8.2
N$14: D11.2 R7.2
N$15: D10.2 R6.2
N$16: D9.2 R5.2
N$17: D6.2 R9.2
N$18: D8.2 R10.2
N$19: R1_BAT.2 U6.1
N$20: CHG_LED.C R1_BAT.1
N$21: R2_BAT.1 U6.5
N$23: C4.1 D3.2 D4.1
PREVGH: D5.1 EDP_C9.1 J4.21
PREVGL: D4.2 EDP_C11.1 J4.23
RESE: J4.3 Q2.2 R3.2
RESE': R2.1 R3.1 SJ1.2
RESET: C5.1 IC2.1 R_RESET.2 RESET_BUTTON.3 RESET_BUTTON.4 U2.3
RTC_RST: U2.16 U4.4
RX: TP2.TP U2.24
SCK: J2.P5 J4.13 TP8.TP U2.6 U5.6
SCL: J3.4 R2-PINH.2 U1.4 U2.20 U3.7 U4.16
SDA: J3.3 R1_PINH.2 U1.3 U2.19 U3.8 U4.15
SRC: C4.2 D5.2 L1.1 Q2.3
SS_SD: J2.P2 U2.4
TX: TP1.TP U2.25
USB_D+: D1.1 U2.14
USB_D-: D1.3 U2.13
VBAT [net]: C2_BAT.1 Q1.3 TP3.TP U3.2 U3.3 U6.3
VBUS [net]: C1_BAT.1 C4_USB.1 C5_USB.1 CHG_LED.A D1.5 D2.1 PFMF.050.1.2 Q1.1 R1_PWRUSB.1 TP14.TP U6.4
VRTC [net]: C8.1 C10_SUPERCAP.1 R_CAPACITOR.2 U4.14
VUSB [net]: J1.A4 J1.A9 J1.B4 J1.B9 PFMF.050.1.1

## Tracks (layer width: path | path; a pad name or v marks a point on that pad's centre or on a via)
3V3  (via drill 0.3)
  Top 0.127: C3.+ 113.75,30.45 112.5,30.45 109.75,33.2 IC1.5 109.5,33.45 108,34.95 108,43.7 106.25,43.7 106,43.45 106,42.7 106.25,42.45 106.25,38.2 105.5,37.45 R2-PINH1.1 105.25,37.2 v103.75,37.2 | C1_BAT2.1 114,38.95 115.25,37.7 115.25,31.95 114,30.7 C3.+ | J3.2 164.25,18.7 157.75,18.7 157.75,1.95 157.25,1.45 114,1.45 114,30.45 C3.+ | U4.2 83.25,54.7 83.25,57.45 83.75,57.95 D7.1 83.75,58.2 83.75,59.45 80.75,59.45 80,58.7 R1_PINH1.1 79.75,58.45 66.25,58.45 66.25,36.2 65.5,35.45 R_CL1.1 65.25,35.45 62,35.45 R9.1 61.75,35.2 61.75,34.95 v61.25,34.45 | v59.75,32.95 59.75,28.45 57.25,25.95 Q3.3 | 25,16.2 27.25,16.2 R7.1 27.5,16.45 27.5,16.7 32,16.7 R6.1 | 25,16.2 22.5,16.2 R8.1 | 25,16.2 v25,40.95 25,41.95 R1.1 | v9.75,46.7 9.75,47.2 9.25,47.7 U2.2 | R10.1 13.75,99.45 13.75,99.95 11.75,99.95 C9.2 11.5,99.95 7.75,96.2 7.75,91.2 6.75,90.2 6.25,90.2 J2.P4 6,90.2 4.25,88.45 4.25,80.95 1.25,80.95 1.25,101.2 15,101.2 20.25,106.45 R_BOOT.1 20.5,106.7 21,107.2 v21,107.45 | U5.7 44.75,54.45 44.75,55.45 U5.8 | 35.5,46.7 35.5,51.7 36.75,52.95 U5.3 37,53.2 37.5,53.2 38.25,53.95 38.25,56.2 42.25,56.2 42.75,55.7 44.5,55.7 U5.8 | 35.5,46.7 35.5,46.45 36.25,45.7 R5.1 | 44.75,107.7 44.5,107.95 44.5,108.95 45,109.45 58.5,109.45 | 44.75,107.7 45.25,107.2 R_RESET.1 45.5,106.95 45.5,106.7 v45.75,106.45 | 58.5,109.45 59,109.45 59,107.45 59.5,106.95 R_CHANGE.1 | v51,101.7 50.25,101.7 IC2.2 | 58.5,109.45 58.5,100.2 59.75,98.95 TP16.TP | 44.75,107.7 44.75,55.7 U5.8 | 35.5,46.7 v32.25,43.45
  Bottom 0.127: v9.75,46.7 15.5,40.95 23.5,40.95 | v25,40.95 23.5,40.95 | v51,101.7 46.25,106.45 v45.75,106.45 22,106.45 v21,107.45 | 23.5,40.95 23.5,43.45 27.75,43.45 | v32.25,43.45 27.75,43.45 | 27.75,43.45 30.5,46.2 46.5,46.2 v59.75,32.95 v61.25,34.45 63,36.2 102.75,36.2 v103.75,37.2
32KHZ  (via drill 0.3)
  Top 0.127: v105.5,42.45 105.5,38.7 R2-PINH1.2 | v86,46.95 84.5,48.45 84.5,54.45 U4.1 | v18.5,46.7 18.5,47.45 18.25,47.7 U2.9
  Bottom 0.127: v105.5,42.45 101,46.95 v86,46.95 18.75,46.95 v18.5,46.7
DN  (via drill 0.3)
  Top 0.127: 164.5,53.45 163.75,53.45 J1.B7 | 164.5,53.45 164.5,54.2 164.25,54.45 163.75,54.45 J1.A7 | v155.5,45.95 153.75,45.95 D1.4 | 164.5,53.45 v164.75,53.2
  Bottom 0.127: v155.5,45.95 162.75,53.2 v164.75,53.2
DP  (via drill 0.3)
  Top 0.127: 162.75,53.95 163.5,53.95 J1.A6 | 162.75,53.95 162.75,54.7 163,54.95 163.5,54.95 J1.B6 | v154.5,48.7 153.75,47.95 D1.6 | 162.75,53.95 v162.5,53.7
  Bottom 0.127: v154.5,48.7 159.5,53.7 v162.5,53.7
EPD_3V3  (via drill 0.3)
  Top 0.127: L1.2 74,34.7 74,33.2 74.25,32.95 C7.1 74.5,32.7 75.25,31.95 75.25,29.45 TP17.TP 75.25,29.2 74.5,28.45 | 71.5,14.2 71,14.2 J4.16 | v61.25,26.95 61.25,26.7 58.25,23.7 Q3.2 | 74.5,28.45 v74.25,28.2 | 74.5,28.45 74.5,21.7 | 74.5,21.7 74.5,19.45 75.75,19.45 EDP_C5.1 | 71.5,14.2 71.5,17.2 72.75,18.45 72.75,19.95 74.5,21.7 | 71.5,14.2 J4.15
  Bottom 0.127: v61.25,26.95 62.5,28.2 v74.25,28.2
EPD_3V3_C  (via drill 0.3)
  Top 0.127: TP13.TP 20.5,73.45 20.5,65.45 U2.18 20.75,65.2 21,64.95 v21,64.2 | 61.5,37.2 60.25,35.95 60.25,27.7 56.25,23.7 Q3.1 | 61.5,37.2 65.25,37.2 65.25,36.7 R_CL1.2 | v45.75,56.7 61.5,40.95 61.5,37.2
  Bottom 0.127: v21,64.2 21.5,63.7 38.75,63.7 v45.75,56.7
EPD_BUSY  (via drill 0.3)
  Top 0.127: v74.5,14.95 74.5,14.2 J4.9 | v9.25,57.95 10.25,58.95 10.25,65.2 U2.26 10.25,65.45 10,65.7 10,73.7 10.75,74.45 TP9.TP
  Bottom 0.127: v74.5,14.95 74.25,15.2 39,15.2 9.25,44.95 v9.25,57.95
EPD_CS  (via drill 0.3)
  Top 0.127: v73.25,19.7 73.25,18.45 73,18.2 73,14.2 J4.12 | 24,44.7 v24,42.95 | 24,44.7 24.5,45.2 TP10.TP 24,44.7 | v20.5,46.45 20.5,47.7 U2.11 | 24,44.7 v23.25,45.45
  Bottom 0.127: v73.25,19.7 67,25.95 41,25.95 v24,42.95 | v20.5,46.45 21.5,45.45 v23.25,45.45
EPD_DC  (via drill 0.3)
  Top 0.127: v73.5,16.2 73.5,14.2 J4.11 | v14,40.95 13,41.95 TP11.TP 13,42.2 13,47.7 U2.5
  Bottom 0.127: v73.5,16.2 72.75,16.95 38,16.95 v14,40.95
EPD_RST  (via drill 0.3)
  Top 0.127: v74,20.45 74,14.2 J4.10 | v25,51.45 v30.75,45.7 | v18,53.2 17,54.2 17,65.2 U2.21 17,65.45 17,73.7 TP12.TP
  Bottom 0.127: v74,20.45 68,26.45 50,26.45 v30.75,45.7 | v25,51.45 23.25,53.2 v18,53.2
FLASH_CS
  Top 0.127: U5.1 36.75,55.7 22,55.7 22,47.95 U2.12
GDR  (via drill 0.3)
  Top 0.127: v78,15.45 78,14.2 J4.2 | v62.25,17.45 61.5,18.2 61.5,22.7 R4.2 | v117,39.45 117,40.7 Q2.1
  Bottom 0.127: v62.25,17.45 76,17.45 v78,15.45 93,15.45 v117,39.45
GND  (via drill 0.3)
  Top 0.127: U2.29_3 12.5,56.45 13.5,56.45 U2.29_6 13.75,56.45 14.75,56.45 U2.29_9 15,56.2 15,55.2 U2.29_8 15,54.95 15,53.95 U2.29_7 14.75,53.95 13.75,53.95 | 12.5,53.95 12.5,54.95 U2.29_2 | 13.75,53.95 13.75,54.95 U2.29_5 | 12.5,53.95 13.5,53.95 U2.29_4 13.75,53.95 | 12.5,53.95 U2.29_1 12.25,53.7 10.75,52.2 | 8.5,49.95 8.5,48.45 8,47.95 U2.1 | 10.75,52.2 8.5,49.95 | 8.5,49.95 8.5,64.7 8,65.2 U2.28 7.75,65.45 7.75,70.45 5.75,72.45 5.75,73.95 16.5,84.7 J2.G1 16.5,84.95 15.75,85.7 15.75,91.45 | 3.5,92.45 6,92.45 J2.P6 | 3.5,92.45 3.5,94.95 J2.G4 3.5,95.2 9,100.7 19.75,100.7 | 3.5,92.45 3.5,82.95 2.5,81.95 J2.G3 | C6.2 27.5,108.45 25.75,106.7 BOOT_BUTTON.2 25.5,106.7 22.25,106.7 BOOT_BUTTON.1 22,106.7 19.75,104.45 19.75,100.7 | 15.75,94.7 11.75,98.7 C9.1 | 15.75,91.45 15.75,94.7 | 15.75,91.45 16.5,90.7 J2.G2 | 15.75,94.7 19.5,98.45 D8.1 19.75,98.7 19.75,100.7 | C5.2 52.5,107.95 51.5,106.95 50.75,106.95 RESET_BUTTON.2 50.5,106.7 50,106.7 | 50,106.7 47.25,106.7 RESET_BUTTON.1 | 50,106.7 50,102.45 IC2.3 52.25,102.45 52.25,102.2 C_DELAY.2 52.5,101.95 57,97.45 | TP4.TP 72.75,104.95 67.75,104.95 67.75,106.45 C10.2 67.5,106.7 65.75,106.7 CHANGE_BUTTON.2 65.5,106.7 62.25,106.7 CHANGE_BUTTON.1 62,106.7 62,97.45 57,97.45 | 24.5,41.7 24.5,42.7 25.75,42.7 25.75,41.2 | 24.5,41.7 24.5,23.7 22.5,21.7 D12.1 | 25.75,41.2 25.75,24.95 D11.1 27.75,22.95 32.75,22.95 33.75,21.95 33.75,20.45 33.25,19.95 D10.1 | 55.75,21.7 55.5,21.45 55.5,17.95 55.75,17.7 SJ1.1 | 55.75,21.7 57.25,21.7 57.25,20.95 R2.2 57.5,20.95 60.75,24.2 62.5,24.2 62.5,22.95 R4.1 62.75,22.7 v62.75,14.7 | 39.25,51.95 40.5,51.95 40.5,53.45 U5.9
  Top 0.127: 39.25,51.95 37,51.95 U5.4 | 39.25,51.95 39.25,49.2 | 39.25,49.2 39.25,46.45 39.75,45.95 D9.1 | 39.25,51.95 U5.9 | 55.75,21.7 52.75,24.7 52.75,45.95 45.25,53.45 | 45.25,53.45 40.75,53.45 U5.9 | 25.75,41.2 41.25,41.2 41.25,47.2 39.25,49.2 | 57,97.45 45.25,85.7 45.25,53.45 | v12,50.95 10.75,52.2 | 24.5,41.7 v23,43.2 | 163.75,50.95 163.75,51.2 J1.B12 | 163.75,50.95 164,50.7 164,49.2 J1.MP3 164.25,49.2 168,49.2 J1.MP1 168.25,49.2 168.25,59.2 J1.MP2 168,59.45 164.25,59.45 J1.MP4 | 163.75,50.95 J1.A1 | J1.B1 163.75,57.2 163.75,57.45 J1.A12 163.75,57.7 164,57.95 164,59.2 J1.MP4 | 149.25,47.45 150.25,47.45 150.25,47.2 150.5,46.95 151,46.95 D1.2 151.25,46.7 152.75,46.7 152.75,43.45 154.25,41.95 | 149.25,47.45 147.5,47.45 C4_USB.2 147.25,47.7 147.25,50.45 140.75,56.95 TP5.TP 140.5,56.95 102.75,56.95 102.75,44.7 104,43.45 | 151.25,51.95 149.25,49.95 149.25,47.45 | 151.25,51.95 153.75,54.45 C5_USB.2 | 151.25,51.95 151.25,59.45 164,59.45 J1.MP4 | 155,7.45 154.75,7.7 154.75,8.2 U1.7 | 155,7.45 156,7.45 156,8.2 U1.5 | 152.75,4.45 150.75,4.45 150.5,4.2 150.5,3.45 151.25,2.7 C1.2 | 152.75,4.45 152.75,3.95 C2.2 | 155,7.45 154.25,6.7 v154.25,5.95 | 152.75,4.45 v153,4.7 | 154.25,41.95 155,42.7 155,43.45 R2-USB1.1 | 154.25,41.95 153.75,41.45 | 153.75,41.45 153.25,40.95 R2-USB.2 | 153.75,41.45 153.75,34.2 | 153.75,34.2 153.75,11.45 U1.1 153.75,11.2 153.75,10.7 v154.25,10.2 | 153.75,34.2 165.5,22.45 165.5,17.95 164.5,17.95 J3.1 | EDP_C6.2 72,20.45 71,20.45 EDP_C7.2 70.75,20.45 69.25,20.45 EDP_C8.2 69,20.45 68,20.45 EDP_C9.2 67.75,20.2 EDP_C10.2 66.25,20.2 | 65.75,13.2 65.75,19.7 66.25,20.2 | 65.75,13.2 65.75,11.95 66,11.7 J4.MP2
  Top 0.127: EDP_C11.2 62.5,27.45 63.5,27.45 EDP_C12.2 63.75,27.45 64.5,28.2 | C7.2 73,32.7 66.75,32.7 66.75,31.95 D6.1 65.5,30.7 65.5,29.2 64.5,28.2 | 66.25,20.2 64.5,21.95 64.5,28.2 | U3.9 120,46.45 120,45.95 119.25,45.95 U3.4 119,45.7 119,45.45 | U3.1 119.25,47.2 120,47.2 120,46.7 U3.9 | U3.6 121,46.45 120.25,46.45 U3.9 | 119,45.45 114,40.45 C1_BAT2.2 113.75,40.2 113.75,39.95 113.25,39.95 | 119,45.45 119,40.45 122.75,36.7 C1_BAT.2 | 108.5,43.95 U6.2 | 108.5,43.95 108.5,42.2 110.75,39.95 113.25,39.95 | 113.25,39.95 113.25,34.2 113.75,33.7 C3.- | 75,12.2 75,13.95 J4.8 | 75,12.2 75,11.7 71.75,11.7 70.5,12.95 70.5,13.95 J4.17 | EDP_C2.2 77,20.7 76,20.7 EDP_C5.2 | J4.MP1 79.5,11.7 v79,12.2 79,18.45 78.5,18.95 EDP_C1.1 78.25,19.2 78.25,19.45 77.25,20.45 EDP_C2.2 | v77,12.2 75,12.2 | 83.25,41.7 85,43.45 C8.2 85.25,43.7 93.25,43.7 93.25,44.95 C10_SUPERCAP.2 97.5,40.95 | 83.25,41.7 83.25,36.95 D3.1 | 83.25,41.7 81.25,43.7 81.25,44.7 80.75,45.2 U4.13 | 101,33.95 101,33.2 R2_BAT.2 101.25,32.95 103.75,30.45 103.75,27.95 104,27.7 C1_BAT1.2 | 101,33.95 101,34.7 98.5,34.7 C2_BAT.2 98.25,34.95 98.25,40.2 97.5,40.95 | 101,33.95 103.25,33.95 | 103.25,33.95 107.25,33.95 107.75,33.45 107.75,32.45 107,32.45 IC1.2 | 103.25,33.95 103.25,42.7 R1_PWRUSB.2 103.5,42.95 104,43.45 | 97.5,40.95 77.25,20.7 EDP_C2.2 | 108.5,43.95 107.75,44.7 107.75,45.45 107,46.2 104.25,46.2 104.25,43.7 104,43.45 | v67,13.2 65.75,13.2
  Bottom 0.127: v12,50.95 19.75,43.2 v23,43.2 | v153,4.7 v154.25,5.95 v154.25,10.2 | v79,12.2 v77,12.2 76,13.2 v67,13.2 64.25,13.2 v62.75,14.7
  pour Top: -14.52,-26.22 233.12,-26.22 233.12,145.12 -14.52,145.12
  pour Bottom: -17.42,-26.82 235.42,-26.82 235.42,147.02 -17.42,147.02
GPI08
  Top 0.127: R1.2 26.25,42.2 26.25,45.45 25,46.7 21,46.7 21,46.2 20.75,45.95 19.5,45.95 19.5,47.7 U2.10
I2C_PW  (via drill 0.3)
  Top 0.127: 155,9.7 155,10.45 154.75,10.7 154.75,11.2 U1.2 | 155,9.7 155,8.7 155.25,8.45 U1.6 | 153.75,2.7 154.5,2.7 R1_PINH.1 154.75,2.7 156.5,2.7 R2-PINH.1 | 153.75,2.7 153,2.7 C2.1 152.75,2.45 151.5,3.7 C1.1 | 153.75,2.7 153.75,8.2 U1.8 153.5,8.45 153.25,8.7 153.25,9.7 | v22.25,63.2 22.25,64.95 22,65.2 U2.17 | v127.5,55.7 153.25,29.95 153.25,9.7 | 153.25,9.7 155,9.7
  Bottom 0.127: v22.25,63.2 29.75,55.7 v127.5,55.7
INT_RTC  (via drill 0.3)
  Top 0.127: R1_PINH1.2 81.75,57.95 81.75,54.7 U4.3 81.75,54.45 81.25,53.95 81.25,53.7 v78,50.45 | TP15.TP 16.5,43.45 16.5,47.45 16.75,47.7 U2.8 17,47.95 17,48.45 v19,50.45
  Bottom 0.127: v19,50.45 v78,50.45
IO/BOOT
  Top 0.127: R_BOOT.2 19.25,106.7 20.75,108.2 22,108.2 BOOT_BUTTON.4 22.25,108.2 25.5,108.2 BOOT_BUTTON.3 25.75,108.45 25.75,109.2 28,109.2 28.25,108.95 28.25,107.7 27.75,107.2 C6.1 27.5,106.95 27.5,68.45 24.5,65.45 U2.15
IO/CHANGE  (via drill 0.3)
  Top 0.127: C10.1 67.5,108.2 65.75,108.2 CHANGE_BUTTON.3 65.5,108.2 62.25,108.2 CHANGE_BUTTON.4 62,108.2 60.5,108.2 | 60.5,108.2 59.75,108.2 R_CHANGE.2 | v14.75,66.7 14.75,65.95 14.25,65.45 U2.23 | v59,100.95 60.5,102.45 60.5,108.2
  Bottom 0.127: v14.75,66.7 49,100.95 v59,100.95
MISO  (via drill 0.3)
  Top 0.127: v36.25,53.7 36.75,54.2 U5.2 | v9.25,58.7 9.25,65.2 U2.27 9,65.45 9,70.95 7.25,72.7 TP6.TP | v5,92.95 5,93.2 6.25,93.2 J2.P7
  Bottom 0.127: v36.25,53.7 14.25,53.7 v9.25,58.7 9.25,63.2 6.5,65.95 5,65.95 v5,92.95
MOSI  (via drill 0.3)
  Top 0.127: 15,40.45 12.75,40.45 6.75,46.45 6.75,65.7 4.75,67.7 4.75,87.2 5,87.45 5,88.7 6.25,88.7 J2.P3 | 15,40.45 15,47.2 15.5,47.7 U2.7 | v72,12.2 72,13.95 J4.14 | v60.25,12.2 59.25,13.2 TP7.TP 59,13.45 57.25,13.45 51.75,18.95 | 51.75,18.95 51.75,44.7 44.75,51.7 U5.5 | 15,40.45 21.25,34.2 21.25,15.95 21.75,15.45 51.75,15.45 51.75,18.95
  Bottom 0.127: v60.25,12.2 v72,12.2
N$1
  Top 0.127: J4.18 70,14.2 70,16.95 72,18.95 EDP_C6.1
N$2  (via drill 0.3)
  Top 0.127: 106,28.2 106.75,28.95 106.75,31.2 IC1.3 | 106,28.2 105.5,27.7 C1_BAT1.1 | 106,28.2 v106,33.2 106.75,33.2 IC1.1 | v70.75,34.7 67.5,34.7 Q1.2 | v115.75,38.95 115.75,35.95 118.75,32.95 D2.2
  Bottom 0.127: v70.75,34.7 72.25,33.2 v106,33.2 110,33.2 v115.75,38.95
N$3  (via drill 0.3)
  Top 0.127: v153.75,44.95 153.75,43.7 R2-USB1.2 | v161.75,52.95 163.5,52.95 J1.A5
  Bottom 0.127: v161.75,52.95 v153.75,44.95
N$4
  Top 0.127: J4.19 69.5,14.2 69.5,17.7 70.75,18.95 EDP_C7.1
N$5
  Top 0.127: J4.4 77,13.95 77,12.95 79.25,10.7 80,10.7 80,18.95 78.5,20.45 EDP_C1.2
N$6
  Top 0.127: J4.5 76.5,14.2 76.5,18.7 77,19.2 EDP_C2.1
N$7
  Top 0.127: J4.20 69,14.2 69,18.95 EDP_C8.1
N$8
  Top 0.127: IC2.5 47.25,100.45 48.75,100.45 49.25,99.95 52.25,99.95 52.25,100.45 C_DELAY.1
N$9  (via drill 0.3)
  Top 0.127: v66.5,17.95 66.5,14.7 67,14.2 J4.24 | v63.75,20.7 63.75,25.95 EDP_C12.1
  Bottom 0.127: v63.75,20.7 v66.5,17.95
N$10
  Top 0.127: R_CAPACITOR.1 88.5,44.45 86.5,46.45 86.5,57.45 86,57.95 D7.2
N$11  (via drill 0.3)
  Top 0.127: v152.25,45.2 152.25,41.2 152,40.95 R2-USB.1 | v159.5,52.45 163,55.95 163.5,55.95 J1.B5
  Bottom 0.127: v159.5,52.45 v152.25,45.2
N$12
  Top 0.127: J4.22 68,14.2 68,17.2 66.5,18.7 EDP_C10.1
N$13
  Top 0.127: R8.2 21.75,17.95 21.75,22.45 22.25,22.95 D12.2
N$14
  Top 0.127: R7.2 27.5,17.7 27.5,21.45 D11.2
N$15
  Top 0.127: R6.2 32.25,18.2 32.25,20.45 33,21.2 D10.2
N$16
  Top 0.127: R5.2 36.5,46.7 38.5,44.7 40.75,44.7 40.75,46.45 40,47.2 D9.2
N$17
  Top 0.127: R9.2 61.75,36.45 60.75,35.45 60.75,34.2 64,30.95 D6.2
N$18
  Top 0.127: R10.2 14.5,99.95 18,99.95 18,98.7 D8.2
N$19  (via drill 0.3)
  Top 0.127: v125,45.45 133.5,45.45 R1_BAT.2 | v110.5,43.7 109.75,42.95 U6.1
  Bottom 0.127: v125,45.45 123.25,43.7 v110.5,43.7
N$20
  Top 0.127: CHG_LED.C 103.5,45.7 103.75,45.95 103.75,46.2 106,48.45 134.25,48.45 134.25,44.7 133.75,44.2 R1_BAT.1
N$21
  Top 0.127: R2_BAT.1 101.25,31.7 103.25,29.7 103.25,27.2 103.5,26.95 108.25,26.95 108.25,34.2 107,35.45 107,42.95 U6.5
N$23
  Top 0.127: C4.1 85.25,35.95 79.75,35.95 79.75,36.7 D3.2 79.5,36.95 79.5,43.95 75,43.95 72.75,41.7 D4.1
PREVGH  (via drill 0.3)
  Top 0.127: J4.21 68.5,14.2 v68.5,18.2 68.5,18.45 68,18.95 EDP_C9.1 | v75,20.7 75,25.45 82.75,33.2 D5.1
  Bottom 0.127: v75,20.7 72.5,18.2 v68.5,18.2
PREVGL
  Top 0.127: J4.23 67.5,13.95 67.5,11.95 66.25,10.7 63.25,10.7 63.25,25.2 62.5,25.95 EDP_C11.1 62.25,26.2 61.75,26.7 61.75,27.95 62.5,27.95 65,30.45 65,31.45 66.75,33.2 66.75,40.2 72.5,40.2 73.5,41.2 73.5,41.45 76,41.45 D4.2
RESE  (via drill 0.3)
  Top 0.127: v77.5,14.95 77.5,14.2 J4.3 | v62.25,15.7 61.25,16.7 61.25,17.45 60.5,18.2 R3.2 | v117.5,38.95 117.5,39.95 118.25,40.7 Q2.2
  Bottom 0.127: v62.25,15.7 76.75,15.7 v77.5,14.95 93.5,14.95 v117.5,38.95
RESE'
  Top 0.127: R2.1 56.25,20.7 57.25,19.7 57.25,17.7 SJ1.2 57.5,17.45 57.5,17.2 60.25,17.2 R3.1
RESET  (via drill 0.3)
  Top 0.127: C5.1 52.75,106.95 53.25,107.45 53.25,108.7 53,108.95 50.75,108.95 50.75,108.45 RESET_BUTTON.3 50.5,108.2 47.25,108.2 RESET_BUTTON.4 47,108.2 46.25,107.45 | 46.5,105.95 46.25,106.2 46.25,107.45 | 46.5,105.95 49,103.45 49,100.7 50,100.7 IC2.1 | 46.25,107.45 46.25,107.7 45.5,108.45 R_RESET.2 | v15.5,64.2 15.5,53.45 11,48.95 11,48.45 10.5,47.95 U2.3 | 46.5,105.95 v46.5,95.2
  Bottom 0.127: v46.5,95.2 v15.5,64.2
RTC_RST  (via drill 0.3)
  Top 0.127: v23.75,63.2 23.75,64.7 23.25,65.2 U2.16 | v79.5,56.2 80.5,55.2 80.5,54.7 U4.4
  Bottom 0.127: v23.75,63.2 30.75,56.2 v79.5,56.2
RX
  Top 0.127: U2.24 12.75,65.45 12.75,69.45 TP2.TP
SCK  (via drill 0.3)
  Top 0.127: v7.25,91.95 6.5,91.2 J2.P5 | v16,54.2 16,49.95 14.25,48.2 14.25,47.95 U2.6 | v72.5,12.7 72.5,13.95 J4.13 | v91.75,10.45 93,9.2 TP8.TP | v57.5,13.95 52.25,19.2 52.25,45.45 44.75,52.95 U5.6 44.5,52.95 43.75,52.2 43.75,50.95 v40.25,50.95
  Bottom 0.127: v7.25,91.95 14.25,84.95 14.25,54.2 v16,54.2 37,54.2 v40.25,50.95 | v91.75,10.45 74.75,10.45 v72.5,12.7 58.75,12.7 v57.5,13.95
SCL  (via drill 0.3)
  Top 0.127: R2-PINH.2 156.75,3.95 156.75,10.7 156.25,11.2 U1.4 156.25,11.45 156.25,20.7 | 156.25,20.7 164.25,20.7 J3.4 | v122,46.95 121.25,46.95 U3.7 | v84.75,47.45 84.5,47.2 84.5,45.45 U4.16 | v21.5,49.95 18.5,52.95 18.5,64.95 18.25,65.2 U2.20 | 156.25,20.7 154.25,22.7 v154.25,32.95
  Bottom 0.127: v21.5,49.95 24,47.45 v84.75,47.45 121.5,47.45 v122,46.95 140.25,46.95 v154.25,32.95
SDA  (via drill 0.3)
  Top 0.127: v37.75,54.2 37.75,56.2 28.25,56.2 19.75,64.7 19.75,64.95 19.5,65.2 U2.19 | v79.25,50.95 83,47.2 83,45.45 U4.15 | 157.25,2.95 157.25,1.95 150.75,1.95 124.5,28.2 124.5,47.45 121.25,47.45 U3.8 121,47.45 v120.5,47.95 | 157.25,2.95 157,3.2 154.75,3.2 154.75,3.7 R1_PINH.2 154.75,3.95 v155.5,4.7 | v155.5,9.45 155.5,11.2 U1.3 | 157.25,2.95 157.25,19.7 164.25,19.7 J3.3
  Bottom 0.127: v37.75,54.2 41,50.95 v79.25,50.95 82.25,47.95 v120.5,47.95 | v155.5,4.7 v155.5,9.45
SRC  (via drill 0.3)
  Top 0.127: 86.25,36.45 85.5,37.2 C4.2 | 86.25,36.45 86.25,35.7 84.5,33.95 79.5,33.95 | 79.5,33.95 79.5,33.45 D5.2 | v117,42.7 117.75,42.7 Q2.3 | 86.25,36.45 v91.75,41.95 | 79.5,33.95 78.5,34.95 78.5,39.2 74,39.2 L1.1
  Bottom 0.127: v117,42.7 116.25,41.95 v91.75,41.95
SS_SD
  Top 0.127: J2.P2 6.5,87.7 5.5,87.7 5.5,87.45 5.25,87.2 5.25,67.7 7.25,65.7 7.25,46.95 8,46.2 11.5,46.2 11.5,47.7 U2.4
TX
  Top 0.127: U2.25 11.5,65.45 11.5,71.45 TP1.TP
USB_D+  (via drill 0.3)
  Top 0.127: v149.75,47.95 151,47.95 D1.1 | v28,55.2 24.5,51.7 24.5,47.95 U2.14
  Bottom 0.127: v149.75,47.95 142.5,55.2 v28,55.2
USB_D-  (via drill 0.3)
  Top 0.127: v148.25,45.95 151,45.95 D1.3 | v25,54.7 23.25,52.95 23.25,47.95 U2.13
  Bottom 0.127: v148.25,45.95 139.5,54.7 v25,54.7
VBAT  (via drill 0.3)
  Top 0.127: U3.2 119.25,46.7 119.25,46.45 U3.3 119,46.2 114,46.2 114,45.95 TP3.TP 113.75,45.7 113.75,44.95 111,44.95 | 111,44.95 109.75,44.95 U6.3 | v70.75,35.7 69.75,35.7 Q1.3 | C2_BAT.1 v97.75,34.2 | v111,40.45 111,44.95
  Bottom 0.127: v70.75,35.7 72.25,34.2 v97.75,34.2 104.75,34.2 v111,40.45
VBUS  (via drill 0.3)
  Top 0.127: TP14.TP 152.75,58.2 154.5,56.45 154.5,53.95 154,53.45 C5_USB.1 154,53.2 155,52.2 155,46.95 v154.75,46.95 153.75,46.95 D1.5 | C4_USB.1 147.5,45.95 v150.25,43.2 150.25,36.2 PFMF.050.1.2 | 121.75,33.7 122.75,34.7 122.75,35.2 C1_BAT.1 | 121.75,33.7 D2.1 | U6.4 106.75,44.95 106.75,45.45 105,45.45 CHG_LED.A 104.75,45.45 104.75,42.95 R1_PWRUSB.1 104.5,42.7 104.5,42.2 v103.75,41.45 | v78,36.95 67.5,36.95 Q1.1 | v115,40.45 121.75,33.7
  Bottom 0.127: 151,43.2 v154.75,46.95 | v150.25,43.2 151,43.2 | v78,36.95 82.5,41.45 v103.75,41.45 114,41.45 v115,40.45 116.75,40.45 124.75,32.45 154.75,32.45 154.75,33.2 151.25,36.7 151,36.7 151,43.2
VRTC
  Top 0.127: 83.75,43.7 82,43.7 82,45.2 U4.14 | C10_SUPERCAP.1 93.25,47.2 92.5,46.45 92.5,45.7 88.75,45.7 R_CAPACITOR.2 88.5,45.7 88.5,58.7 85.5,58.7 85.25,58.45 85.25,58.2 83.75,56.7 83.75,43.7 | 83.75,43.7 C8.1
VUSB
  Top 0.127: 163.75,51.95 163.75,51.7 J1.A4 163.5,51.7 156,51.7 156,37.2 155,36.2 PFMF.050.1.1 | 163.75,56.45 163.75,56.7 J1.A9 | 163.75,51.95 165.25,51.95 165.25,55.45 164.25,56.45 163.75,56.45 | 163.75,51.95 J1.B9 | 163.75,56.45 J1.B4